# EAGLE board hirose_omnetics_adapter_schematic_rev2 (EAGLE 7.2.0)
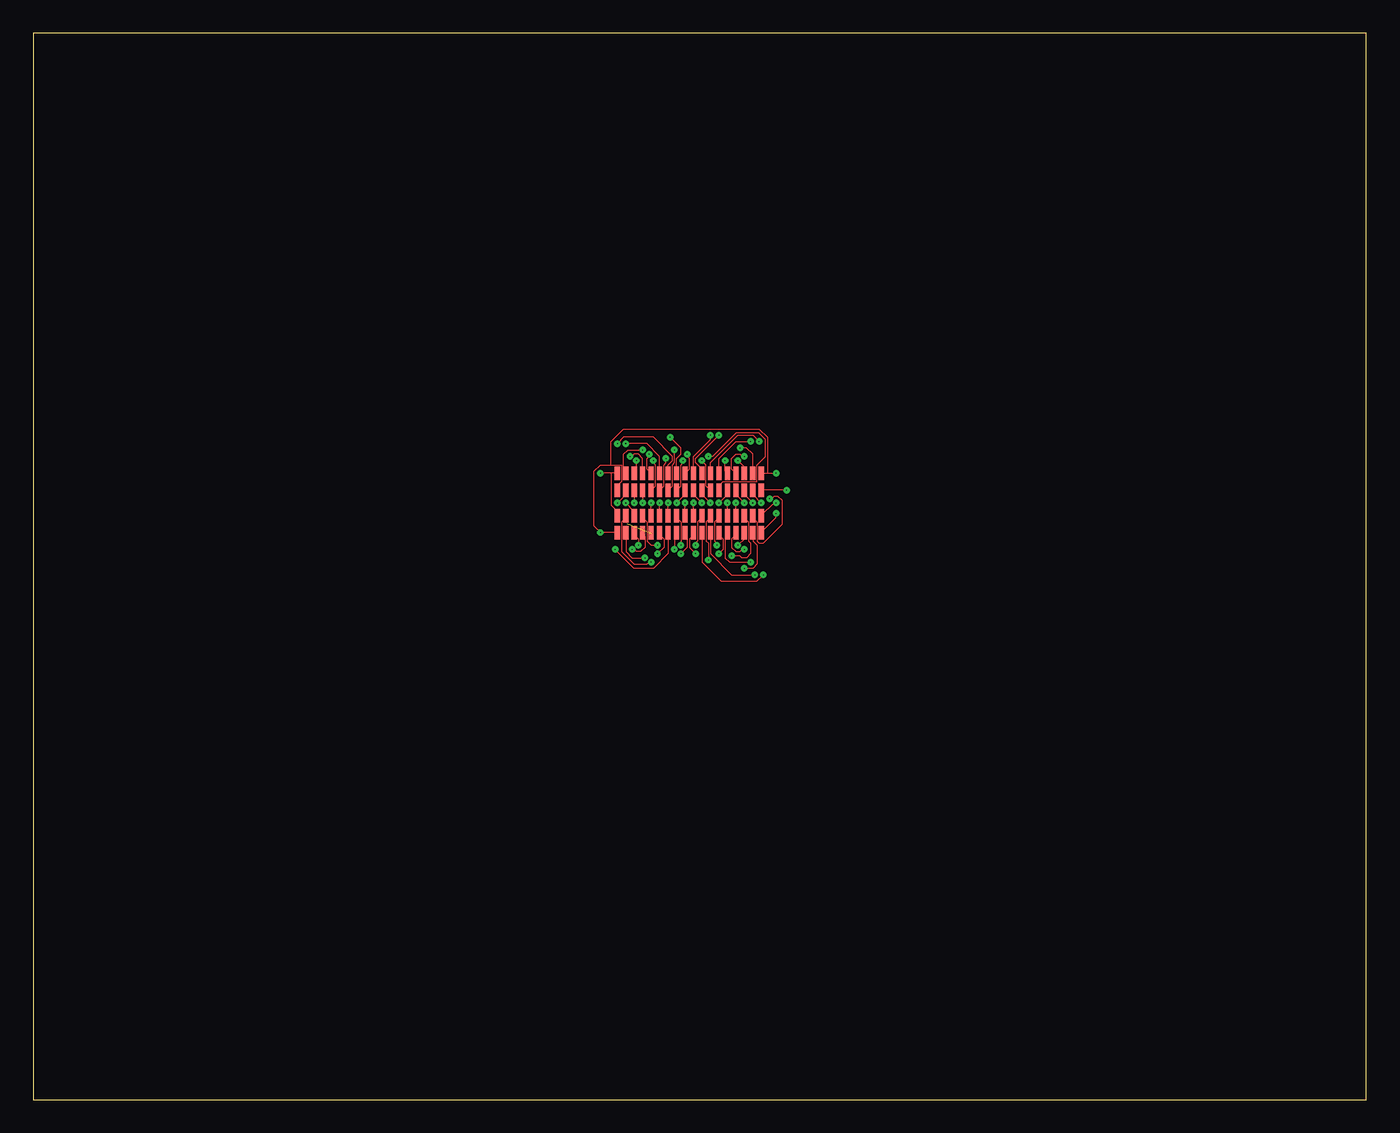
[diagram p0: board, top side]
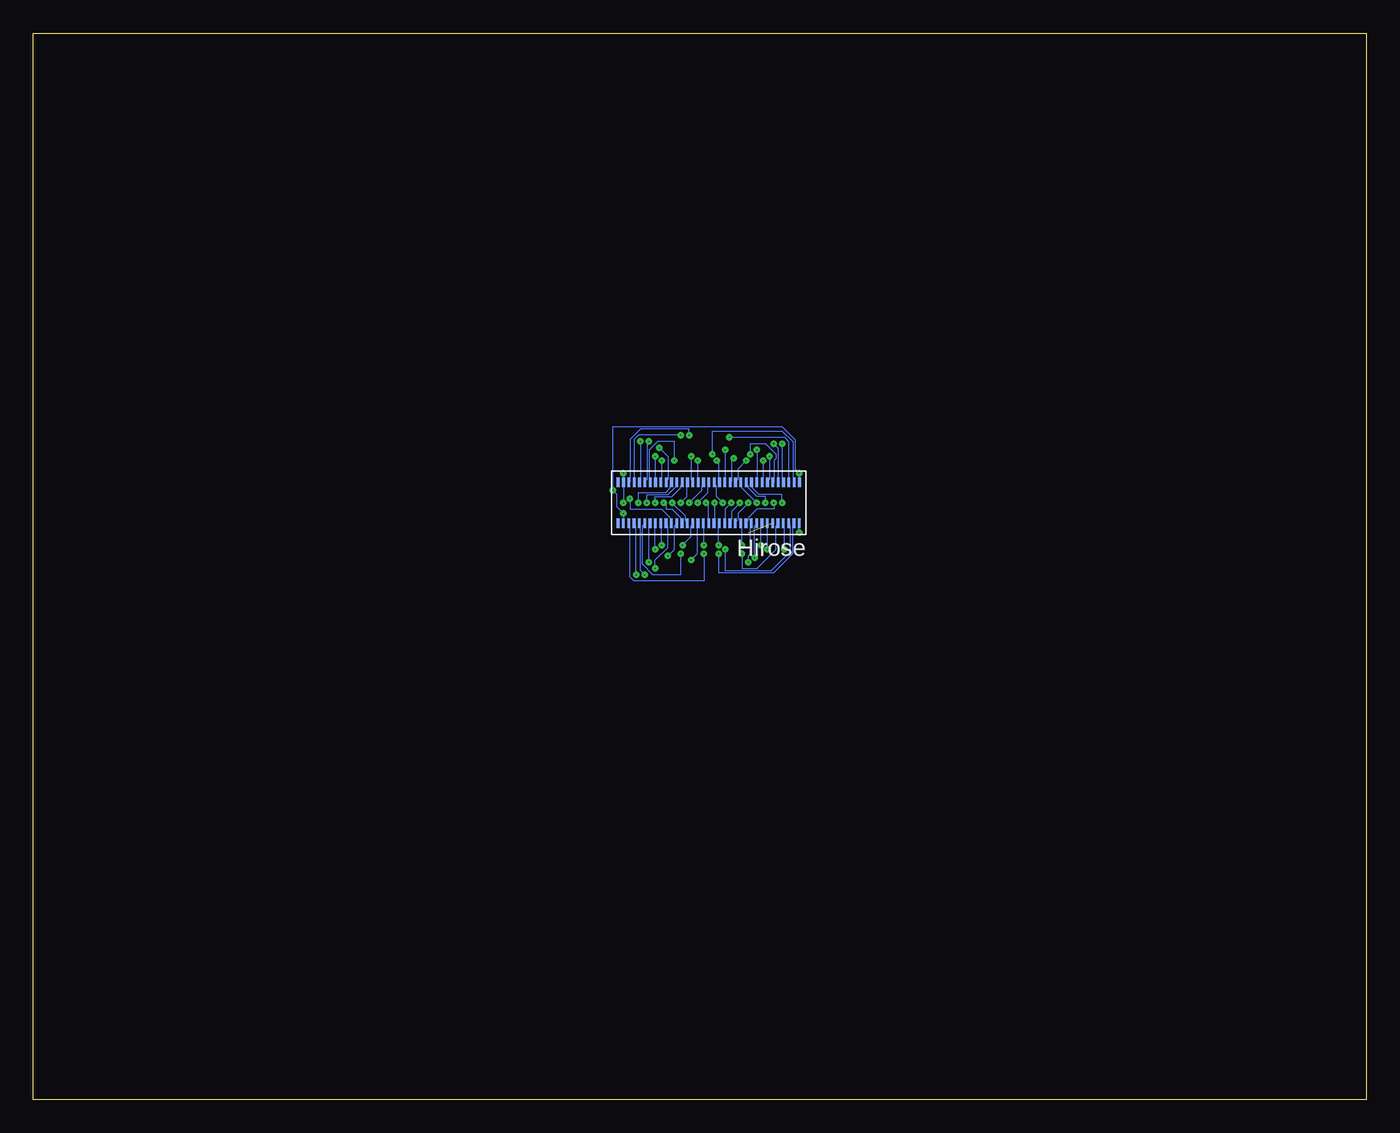
[diagram p1: board, bottom side, seen from below]

Size 100 x 80 mm. Coordinates in mm from the lower left corner, seen from the top.
Outline: 0,0 100,0 100,80 0,80 0,0
Copper layers (1*16): Top 0.035mm / dielectric 1.5mm / Bottom 0.035mm
Design rules "hirose_64ch_adapter_board_DesignRules": minimum track width 3mil, minimum drill 3mil, track to track 3mil, track to pad 3mil, pad to pad 3mil, via to via 3mil, smd to smd 3mil, copper to edge 40mil, drill to drill 5mil, minimum pad ring 10mil, minimum via ring 8mil, stop-mask expansion 4mil, vias tented up to drill 0mil, thermal gap 10mil

## Footprints (pad centres in the part's own frame; a part is rotated, then mirrored left to right if it is on the bottom)
HIROSE_DF40C-70DS = smd 0.2 x 0.7: P$1 0,0; P$2 -0.4,0; P$3 -0.8,0; P$4 -1.2,0; P$5 -1.6,0; P$6 -2,0; P$7 -2.4,0; P$8 -2.8,0; P$9 -3.2,0; P$10 -3.6,0; P$11 -4,0; P$12 -4.4,0; P$13 -4.8,0; P$14 -5.2,0; P$15 -5.6,0; P$16 -6,0; P$17 -6.4,0; P$18 -6.8,0; P$19 -7.2,0; P$20 -7.6,0; P$21 -8,0; P$22 -8.4,0; P$23 -8.8,0; P$24 -9.2,0; P$25 -9.6,0; P$26 -10,0; P$27 -10.4,0; P$28 -10.8,0; P$29 -11.2,0; P$30 -11.6,0; P$31 -12,0; P$32 -12.4,0; P$33 -12.8,0; P$34 -13.2,0; P$35 -13.6,0; P$36 0,-3.08; P$37 -0.42,-3.08; P$38 -0.82,-3.08; P$39 -1.22,-3.08; P$40 -1.62,-3.08; P$41 -2.02,-3.08; P$42 -2.42,-3.08; P$43 -2.82,-3.08; P$44 -3.22,-3.08; P$45 -3.62,-3.08; P$46 -4.02,-3.08; P$47 -4.42,-3.08; P$48 -4.82,-3.08; P$49 -5.22,-3.08; P$50 -5.62,-3.08; P$51 -6.02,-3.08; P$52 -6.42,-3.08; P$53 -6.82,-3.08; P$54 -7.22,-3.08; P$55 -7.62,-3.08; P$56 -8.02,-3.08; P$57 -8.42,-3.08; P$58 -8.82,-3.08; P$59 -9.22,-3.08; P$60 -9.62,-3.08; P$61 -10.02,-3.08; P$62 -10.42,-3.08; P$63 -10.82,-3.08; P$64 -11.22,-3.08; P$65 -11.62,-3.08; P$66 -12.02,-3.08; P$67 -12.42,-3.08; P$68 -12.82,-3.08; P$69 -13.22,-3.08; P$70 -13.62,-3.08
OMNETICS_A79026-001 = smd 0.381 x 1.016: P$1 0,0; P$2 -0.635,0; P$3 -1.27,0; P$4 -1.905,0; P$5 -2.54,0; P$6 -3.175,0; P$7 -3.81,0; P$8 -4.445,0; P$9 -5.08,0; P$10 -5.715,0; P$11 -6.35,0; P$12 -6.985,0; P$13 -7.62,0; P$14 -8.255,0; P$15 -8.89,0; P$16 -9.525,0; P$17 -10.16,0; P$18 -10.795,0; P$19 0,-1.27; P$20 -0.635,-1.27; P$21 -1.27,-1.27; P$22 -1.905,-1.27; P$23 -2.54,-1.27; P$24 -3.175,-1.27; P$25 -3.81,-1.27; P$26 -4.445,-1.27; P$27 -5.08,-1.27; P$28 -5.715,-1.27; P$29 -6.35,-1.27; P$30 -6.985,-1.27; P$31 -7.62,-1.27; P$32 -8.255,-1.27; P$33 -8.89,-1.27; P$34 -9.525,-1.27; P$35 -10.16,-1.27; P$36 -10.795,-1.27

## Placement (x,y rotation side)
U$1  HIROSE_DF40_70PIN  [HIROSE_DF40C-70DS]  56.13,43.24 180 bottom
U$2  OMNETICS_A79026  [OMNETICS_A79026-001]  54.61,46.99 0 top
U$3  OMNETICS_A79026  [OMNETICS_A79026-001]  54.61,43.79 0 top

## Library data of the parts
U$1 = GG_hirose70
U$2 U$3 = Omnetics_A79026-001

## Nets
A0: U$1.P$69 U$2.P$10
A1: U$1.P$68 U$2.P$11
A2: U$1.P$67 U$2.P$12
A3: U$1.P$66 U$2.P$13
A4: U$1.P$65 U$2.P$14
A5: U$1.P$64 U$2.P$15
A6: U$1.P$63 U$2.P$16
A7: U$1.P$62 U$2.P$17
B0: U$1.P$38 U$2.P$9
B1: U$1.P$39 U$2.P$8
B2: U$1.P$40 U$2.P$7
B3: U$1.P$41 U$2.P$6
B4: U$1.P$42 U$2.P$5
B5: U$1.P$43 U$2.P$4
B6: U$1.P$44 U$2.P$3
B7: U$1.P$45 U$2.P$2
C0: U$1.P$34 U$3.P$28
C1: U$1.P$33 U$3.P$29
C2: U$1.P$32 U$3.P$30
C3: U$1.P$31 U$3.P$31
C4: U$1.P$30 U$3.P$32
C5: U$1.P$29 U$3.P$33
C6: U$1.P$28 U$3.P$34
C7: U$1.P$27 U$3.P$35
D0: U$1.P$3 U$3.P$27
D1: U$1.P$4 U$3.P$26
D2: U$1.P$5 U$3.P$25
D3: U$1.P$6 U$3.P$24
D4: U$1.P$7 U$3.P$23
D5: U$1.P$8 U$3.P$22
D6: U$1.P$9 U$3.P$21
D7: U$1.P$10 U$3.P$20
GND: U$1.P$35 U$1.P$37 U$2.P$1 U$2.P$36 U$3.P$1 U$3.P$36
N$1: U$1.P$61 U$2.P$35
N$2: U$1.P$2 U$1.P$70 U$2.P$18 U$2.P$19 U$3.P$18 U$3.P$19
N$3: U$1.P$60 U$2.P$34
N$4: U$1.P$59 U$2.P$33
N$5: U$1.P$58 U$2.P$32
N$6: U$1.P$57 U$2.P$31
N$7: U$1.P$56 U$2.P$30
N$8: U$1.P$55 U$2.P$29
N$9: U$1.P$54 U$2.P$28
N$10: U$1.P$53 U$2.P$27
N$11: U$1.P$52 U$2.P$26
N$12: U$1.P$51 U$2.P$25
N$13: U$1.P$50 U$2.P$24
N$14: U$1.P$49 U$2.P$23
N$15: U$1.P$48 U$2.P$22
N$16: U$1.P$47 U$2.P$21
N$17: U$1.P$46 U$2.P$20
N$18: U$1.P$26 U$3.P$17
N$19: U$1.P$25 U$3.P$16
N$20: U$1.P$24 U$3.P$15
N$21: U$1.P$23 U$3.P$14
N$22: U$1.P$22 U$3.P$13
N$23: U$1.P$21 U$3.P$12
N$24: U$1.P$20 U$3.P$11
N$25: U$1.P$19 U$3.P$10
N$26: U$1.P$18 U$3.P$9
N$27: U$1.P$17 U$3.P$8
N$28: U$1.P$16 U$3.P$7
N$29: U$1.P$15 U$3.P$6
N$30: U$1.P$14 U$3.P$5
N$31: U$1.P$13 U$3.P$4
N$32: U$1.P$12 U$3.P$3
N$33: U$1.P$11 U$3.P$2

## Tracks (layer width: path | path; a pad name or v marks a point on that pad's centre or on a via)
A0  (via drill 0.08)
  Top 0.076: v49.05,48.42 49.05,48.26 49.21,48.1 49.21,47.31 U$2.P$10
  Bottom 0.076: v49.05,48.42 49.05,50.16 43.81,50.16 43.02,49.37 43.02,46.51 42.86,46.35 U$1.P$69
A1  (via drill 0.08)
  Top 0.076: v47.78,49.69 48.58,48.9 48.58,48.42 48.26,48.1 U$2.P$11
  Bottom 0.076: v47.78,49.69 43.66,49.69 43.34,49.37 43.34,46.35 U$1.P$68
A2  (via drill 0.08)
  Top 0.076: v43.81,49.21 44.29,49.69 46.51,49.69 47.94,48.26 47.94,47.94 47.62,47.62 U$2.P$12
  Bottom 0.076: v43.81,49.21 43.81,46.51 43.66,46.35 U$1.P$67
A3  (via drill 0.08)
  Top 0.076: v44.45,49.21 46.04,49.21 46.99,48.26 U$2.P$13
  Bottom 0.076: v44.45,49.21 44.13,48.9 44.13,46.35 U$1.P$66
A4  (via drill 0.08)
  Top 0.076: v46.2,48.42 46.2,48.26 46.04,48.1 46.04,47.31 U$2.P$14
  Bottom 0.076: v46.2,48.42 46.2,49.21 45.09,49.21 44.29,48.42 44.29,48.1 44.45,47.94 44.45,46.35 U$1.P$65
A5  (via drill 0.08)
  Top 0.076: v44.77,48.26 44.93,48.26 45.09,48.42 45.4,48.42 45.72,48.1 U$2.P$15
  Bottom 0.076: v44.77,48.26 44.77,46.51 44.93,46.35 U$1.P$64
A6  (via drill 0.08)
  Top 0.076: v45.24,47.94 45.24,47.15 U$2.P$16
  Bottom 0.076: v45.24,47.94 45.24,46.35 U$1.P$63
A7  (via drill 0.08)
  Top 0.076: v45.72,48.74 44.61,48.74 44.29,48.42 44.29,47.15 U$2.P$17
  Bottom 0.076: v45.72,48.74 45.72,46.35 U$1.P$62
B0  (via drill 0.08)
  Top 0.076: v50.8,49.85 50.8,49.53 49.53,48.26 U$2.P$9
  Bottom 0.076: v50.8,49.85 50.8,50.32 54.45,50.32 55.24,49.53 55.24,46.35 U$1.P$38
B1  (via drill 0.08)
  Top 0.076: v51.44,49.85 49.69,48.1 49.69,47.78 50.16,47.31 U$2.P$8
  Bottom 0.076: v51.44,49.85 54.61,49.85 54.93,49.53 54.93,46.35 U$1.P$39
B2  (via drill 0.08)
  Top 0.076: v54.45,49.37 53.98,49.85 52.86,49.85 50.8,47.78 U$2.P$7
  Bottom 0.076: v54.45,49.37 54.45,46.35 U$1.P$40
B3  (via drill 0.08)
  Top 0.076: v53.82,49.37 52.7,49.37 51.44,48.1 U$2.P$6
  Bottom 0.076: v53.82,49.37 53.98,49.21 53.98,46.51 54.13,46.35 U$1.P$41
B4  (via drill 0.08)
  Top 0.076: v51.91,47.94 51.91,47.15 U$2.P$5
  Bottom 0.076: v51.91,47.94 51.91,49.37 53.18,49.37 53.82,48.74 53.82,46.51 53.66,46.35 U$1.P$42
B5  (via drill 0.08)
  Top 0.076: v53.34,48.26 53.18,48.26 53.02,48.42 52.7,48.42 52.39,48.1 52.39,47.31 U$2.P$4
  Bottom 0.076: v53.34,48.26 53.34,46.35 U$1.P$43
B6  (via drill 0.08)
  Top 0.076: v52.86,47.94 53.34,47.47 U$2.P$3
  Bottom 0.076: v52.86,47.94 52.86,46.35 U$1.P$44
B7  (via drill 0.08)
  Top 0.076: v53.02,48.9 53.5,48.9 53.98,48.42 U$2.P$2
  Bottom 0.076: v53.02,48.9 52.39,48.26 52.39,46.51 52.55,46.35 U$1.P$45
C0  (via drill 0.08)
  Top 0.076: v48.58,40.96 49.05,41.43 49.05,42.23 48.9,42.39 U$3.P$28
  Bottom 0.076: v48.58,40.96 48.58,39.53 44.45,39.53 43.02,40.96 43.02,43.18 U$1.P$34
C1  (via drill 0.08)
  Top 0.076: v48.1,41.27 48.1,42.23 48.26,42.39 U$3.P$29
  Bottom 0.076: v48.1,41.27 48.1,39.69 44.61,39.69 43.18,41.12 43.18,43.02 43.34,43.18 U$1.P$33
C2  (via drill 0.08)
  Top 0.076: v43.66,41.27 45.09,39.85 46.51,39.85 47.62,40.96 U$3.P$30
  Bottom 0.076: v43.66,41.27 43.66,43.18 U$1.P$32
C3  (via drill 0.08)
  Top 0.076: v46.83,40.96 47.31,41.43 47.31,42.07 46.99,42.39 U$3.P$31
  Bottom 0.076: v46.83,40.96 46.83,39.85 45.72,39.85 44.29,41.27 44.29,43.02 44.13,43.18 U$1.P$31
C4  (1 unrouted)
C5  (via drill 0.08)
  Top 0.076: v44.93,41.27 45.09,41.27 45.24,41.12 45.56,41.12 45.88,41.43 45.88,42.23 45.72,42.39 U$3.P$33
  Bottom 0.076: v44.93,41.27 44.93,43.18 U$1.P$29
C6  (via drill 0.08)
  Top 0.076: v45.4,41.59 45.4,42.07 45.09,42.39 U$3.P$34
  Bottom 0.076: v45.4,41.59 45.4,43.18 U$1.P$28
C7  (via drill 0.08)
  Top 0.076: v45.88,40.64 44.93,40.64 44.45,41.12 U$3.P$35
  Bottom 0.076: v45.88,40.64 45.88,43.02 45.72,43.18 U$1.P$27
D0  (via drill 0.08)
  Top 0.076: v49.69,40.96 49.21,41.43 49.21,42.07 49.53,42.39 U$3.P$27
  Bottom 0.076: v49.69,40.96 49.69,38.89 54.93,38.89 55.24,39.21 55.24,43.18 U$1.P$3
D1  (via drill 0.08)
  Top 0.076: v54.77,39.37 54.29,38.89 51.59,38.89 50.16,40.32 U$3.P$26
  Bottom 0.076: v54.77,39.37 54.77,43.02 54.93,43.18 U$1.P$4
D2  (via drill 0.08)
  Top 0.076: v54.13,39.37 52.39,39.37 50.8,40.96 U$3.P$25
  Bottom 0.076: v54.13,39.37 54.45,39.69 54.45,43.18 U$1.P$5
D3  (via drill 0.08)
  Top 0.076: v51.44,40.96 51.75,41.27 51.75,42.07 51.44,42.39 U$3.P$24
  Bottom 0.076: v51.44,40.96 51.44,39.37 53.5,39.37 54.29,40.16 54.29,43.02 54.13,43.18 U$1.P$6
D4  (via drill 0.08)
  Top 0.076: v53.82,40.32 52.23,40.32 51.91,40.64 51.91,42.23 52.07,42.39 U$3.P$23
  Bottom 0.076: v53.82,40.32 53.82,43.18 U$1.P$7
D5  (via drill 0.08)
  Top 0.076: v53.34,41.27 53.18,41.27 53.02,41.12 52.7,41.12 52.39,41.43 52.39,42.07 52.7,42.39 U$3.P$22
  Bottom 0.076: v53.34,41.27 53.34,43.18 U$1.P$8
D6  (via drill 0.08)
  Top 0.076: v52.86,41.59 53.34,42.07 U$3.P$21
  Bottom 0.076: v52.86,41.59 52.86,43.18 U$1.P$9
D7  (via drill 0.08)
  Top 0.076: v53.34,39.85 53.98,39.85 54.29,40.16 54.29,41.59 53.98,41.91 U$3.P$20
  Bottom 0.076: v53.34,39.85 53.34,40.48 52.39,41.43 52.39,43.02 52.55,43.18 U$1.P$10
GND  (via drill 0.08)
  Top 0.076: U$2.P$1 55.09,46.99 | 55.09,46.99 v55.72,46.99 | v55.72,44.77 55.56,44.77 54.61,43.81 U$3.P$1 | U$3.P$36 43.81,42.55 v42.55,42.55 42.07,43.02 42.07,47.15 42.55,47.62 43.34,47.62 | U$2.P$36 43.81,46.04 44.13,46.35 44.13,47.62 43.34,47.62 | 55.09,46.99 55.09,49.69 54.45,50.32 44.29,50.32 43.34,49.37 43.34,47.62
  Bottom 0.076: v55.72,46.99 55.72,46.35 U$1.P$37 55.72,46.2 v55.72,44.77 | v42.55,42.55 42.55,43.18 U$1.P$35
N$1  (via drill 0.08)
  Top 0.076: v43.81,44.77 44.45,45.4 U$2.P$35
  Bottom 0.076: v43.81,44.77 43.81,45.4 45.56,45.4 46.04,45.88 46.04,46.2 U$1.P$61
N$2  (via drill 0.08)
  Top 0.076: U$2.P$18 43.34,46.99 | 43.34,46.99 v42.55,46.99 | U$3.P$18 43.81,44.13 43.34,44.61 43.34,46.99 | v55.72,43.97 55.72,43.66 54.61,42.55 U$3.P$19 | v56.52,45.72 U$2.P$19
  Bottom 0.076: U$1.P$70 42.55,46.35 v42.55,46.99 42.86,47.31 42.86,49.53 43.81,50.48 56.52,50.48 v56.52,45.72 56.2,45.4 56.2,44.45 v55.72,43.97 55.72,43.34 U$1.P$2
N$3  (via drill 0.08)
  Top 0.076: U$2.P$34 v45.09,44.77
  Bottom 0.076: v45.09,44.77 45.09,45.24 45.72,45.24 46.35,45.88 46.35,46.04 46.51,46.2 U$1.P$60
N$4  (via drill 0.08)
  Top 0.076: U$2.P$33 v45.72,44.77
  Bottom 0.076: v45.72,44.77 46.83,45.88 46.83,46.2 U$1.P$59
N$5  (via drill 0.08)
  Top 0.076: v46.51,47.94 46.51,47.78 46.67,47.62 46.67,46.04 U$2.P$32
  Bottom 0.076: v46.51,47.94 47.15,47.31 47.15,46.51 47.31,46.35 U$1.P$58
N$6  (via drill 0.08)
  Top 0.076: v47.47,48.1 47.47,47.78 47.31,47.62 47.31,46.04 U$2.P$31
  Bottom 0.076: v47.47,48.1 47.62,47.94 47.62,46.35 U$1.P$57
N$7  (via drill 0.08)
  Top 0.076: v48.1,48.74 48.1,47.78 47.94,47.62 47.94,46.04 U$2.P$30
  Bottom 0.076: v48.1,48.74 48.1,46.35 U$1.P$56
N$8  (via drill 0.08)
  Top 0.076: v48.74,47.94 48.74,47.78 48.58,47.62 48.58,46.04 U$2.P$29
  Bottom 0.076: v48.74,47.94 48.58,47.78 48.58,46.35 U$1.P$55
N$9  (via drill 0.08)
  Top 0.076: v48.26,44.77 48.9,45.4 U$2.P$28
  Bottom 0.076: v48.26,44.77 48.74,45.24 48.74,46.04 48.9,46.2 U$1.P$54
N$10  (via drill 0.08)
  Top 0.076: v50.16,44.77 49.53,45.4 U$2.P$27
  Bottom 0.076: v50.16,44.77 49.37,45.56 49.37,46.2 U$1.P$53
N$11  (via drill 0.08)
  Top 0.076: v50.8,44.77 50.16,45.4 U$2.P$26
  Bottom 0.076: v50.8,44.77 49.85,45.72 49.85,46.04 49.69,46.2 U$1.P$52
N$12  (via drill 0.08)
  Top 0.076: v50.16,47.94 50.48,47.62 50.48,46.04 U$2.P$25
  Bottom 0.076: v50.16,47.94 50.16,46.35 U$1.P$51
N$13  (via drill 0.08)
  Top 0.076: v50.64,48.26 50.96,48.26 52.7,50.01 54.45,50.01 54.93,49.53 54.93,48.26 54.29,47.62 54.29,46.35 51.75,46.35 51.44,46.04 U$2.P$24
  Bottom 0.076: v50.64,48.26 50.64,46.51 50.48,46.35 U$1.P$50
N$14  (via drill 0.08)
  Top 0.076: v51.44,44.77 52.07,45.4 U$2.P$23
  Bottom 0.076: v51.44,44.77 50.96,45.24 50.96,46.2 U$1.P$49
N$15  (via drill 0.08)
  Top 0.076: v53.34,44.77 52.7,45.4 U$2.P$22
  Bottom 0.076: v53.34,44.77 53.34,45.24 52.07,45.24 51.44,45.88 51.44,46.04 51.28,46.2 U$1.P$48
N$16  (via drill 0.08)
  Top 0.076: v53.98,44.77 53.34,45.4 U$2.P$21
  Bottom 0.076: v53.98,44.77 53.98,45.4 52.39,45.4 51.75,46.04 51.75,46.2 U$1.P$47
N$17  (via drill 0.08)
  Top 0.076: v54.61,44.77 53.98,45.4 U$2.P$20
  Bottom 0.076: v54.61,44.77 54.61,45.56 52.55,45.56 52.23,45.88 52.23,46.04 52.07,46.2 U$1.P$46
N$18  (via drill 0.08)
  Top 0.076: v46.35,40.32 46.2,40.32 46.04,40.16 45.09,40.16 44.13,41.12 44.13,43.34 44.45,43.66 U$3.P$17
  Bottom 0.076: v46.35,40.32 46.35,40.8 46.2,40.96 46.2,43.18 U$1.P$26
N$19  (via drill 0.08)
  Top 0.076: v44.45,44.77 45.09,44.13 U$3.P$16
  Bottom 0.076: v44.45,44.77 44.45,44.29 45.72,44.29 46.35,43.66 46.35,43.5 46.51,43.34 U$1.P$25
N$20  (via drill 0.08)
  Top 0.076: v46.83,41.59 46.35,41.59 46.04,41.91 46.04,43.34 45.72,43.66 U$3.P$15
  Bottom 0.076: v46.83,41.59 46.83,43.02 46.99,43.18 U$1.P$24
N$21  (via drill 0.08)
  Top 0.076: U$3.P$14 v46.35,44.77
  Bottom 0.076: v46.35,44.77 47.15,43.97 47.15,43.5 47.31,43.34 U$1.P$23
N$22  (via drill 0.08)
  Top 0.076: U$3.P$13 v46.99,44.77
  Bottom 0.076: v46.99,44.77 47.62,44.13 47.62,43.5 47.78,43.34 U$1.P$22
N$23  (via drill 0.08)
  Top 0.076: U$3.P$12 v47.62,44.77
  Bottom 0.076: v47.62,44.77 48.1,44.29 48.1,43.34 U$1.P$21
N$24  (via drill 0.08)
  Top 0.076: v48.58,41.59 48.58,43.34 48.26,43.66 U$3.P$11
  Bottom 0.076: v48.58,41.59 48.58,43.18 U$1.P$20
N$25  (via drill 0.08)
  Top 0.076: U$3.P$10 v48.9,44.77
  Bottom 0.076: v48.9,44.77 48.9,43.34 U$1.P$19
N$26  (via drill 0.08)
  Top 0.076: U$3.P$9 v49.53,44.77
  Bottom 0.076: v49.53,44.77 49.37,44.61 49.37,43.34 U$1.P$18
N$27  (via drill 0.08)
  Top 0.076: v49.69,41.59 49.69,41.75 49.85,41.91 49.85,43.34 50.16,43.66 U$3.P$8
  Bottom 0.076: v49.69,41.59 49.69,43.18 U$1.P$17
N$28  (via drill 0.08)
  Top 0.076: v50.64,40.48 50.64,41.75 50.48,41.91 50.48,43.34 50.8,43.66 U$3.P$7
  Bottom 0.076: v50.64,40.48 50.16,40.96 50.16,43.18 U$1.P$16
N$29  (via drill 0.08)
  Top 0.076: v51.28,41.59 51.28,41.75 51.12,41.91 51.12,43.34 51.44,43.66 U$3.P$6
  Bottom 0.076: v51.28,41.59 50.64,42.23 50.64,43.02 50.48,43.18 U$1.P$15
N$30  (via drill 0.08)
  Top 0.076: U$3.P$5 v52.07,44.77
  Bottom 0.076: v52.07,44.77 51.12,43.81 51.12,43.5 50.96,43.34 U$1.P$14
N$31  (via drill 0.08)
  Top 0.076: U$3.P$4 v52.7,44.77
  Bottom 0.076: v52.7,44.77 52.55,44.61 52.55,44.29 52.07,44.29 51.44,43.66 51.44,43.5 51.28,43.34 U$1.P$13
N$32  (via drill 0.08)
  Top 0.076: v52.39,40.8 53.02,40.8 53.18,40.64 53.5,40.64 53.82,40.96 53.82,41.75 53.66,41.91 53.66,43.34 53.34,43.66 U$3.P$3
  Bottom 0.076: v52.39,40.8 51.91,41.27 51.91,43.02 51.75,43.18 U$1.P$12
N$33  (via drill 0.08)
  Top 0.076: v55.24,45.09 55.4,45.09 55.56,45.24 55.88,45.24 56.2,44.93 56.2,43.18 54.77,41.75 54.45,41.75 54.29,41.91 54.29,43.34 53.98,43.66 U$3.P$2
  Bottom 0.076: v55.24,45.09 55.24,44.29 52.86,44.29 52.23,43.66 52.23,43.34 U$1.P$11